# Altium PCB OpenAGBoardPart2.PcbDoc
Units mil, origin at the board's own origin, x right, y up, seen from the top; angles counter-clockwise.
Board outline 3937.01 x 3149.61 mil, 2 copper layers (Top, Bottom), stack 61.811 mil thick; 48 components, 36 nets, 240 pads, 55 vias.
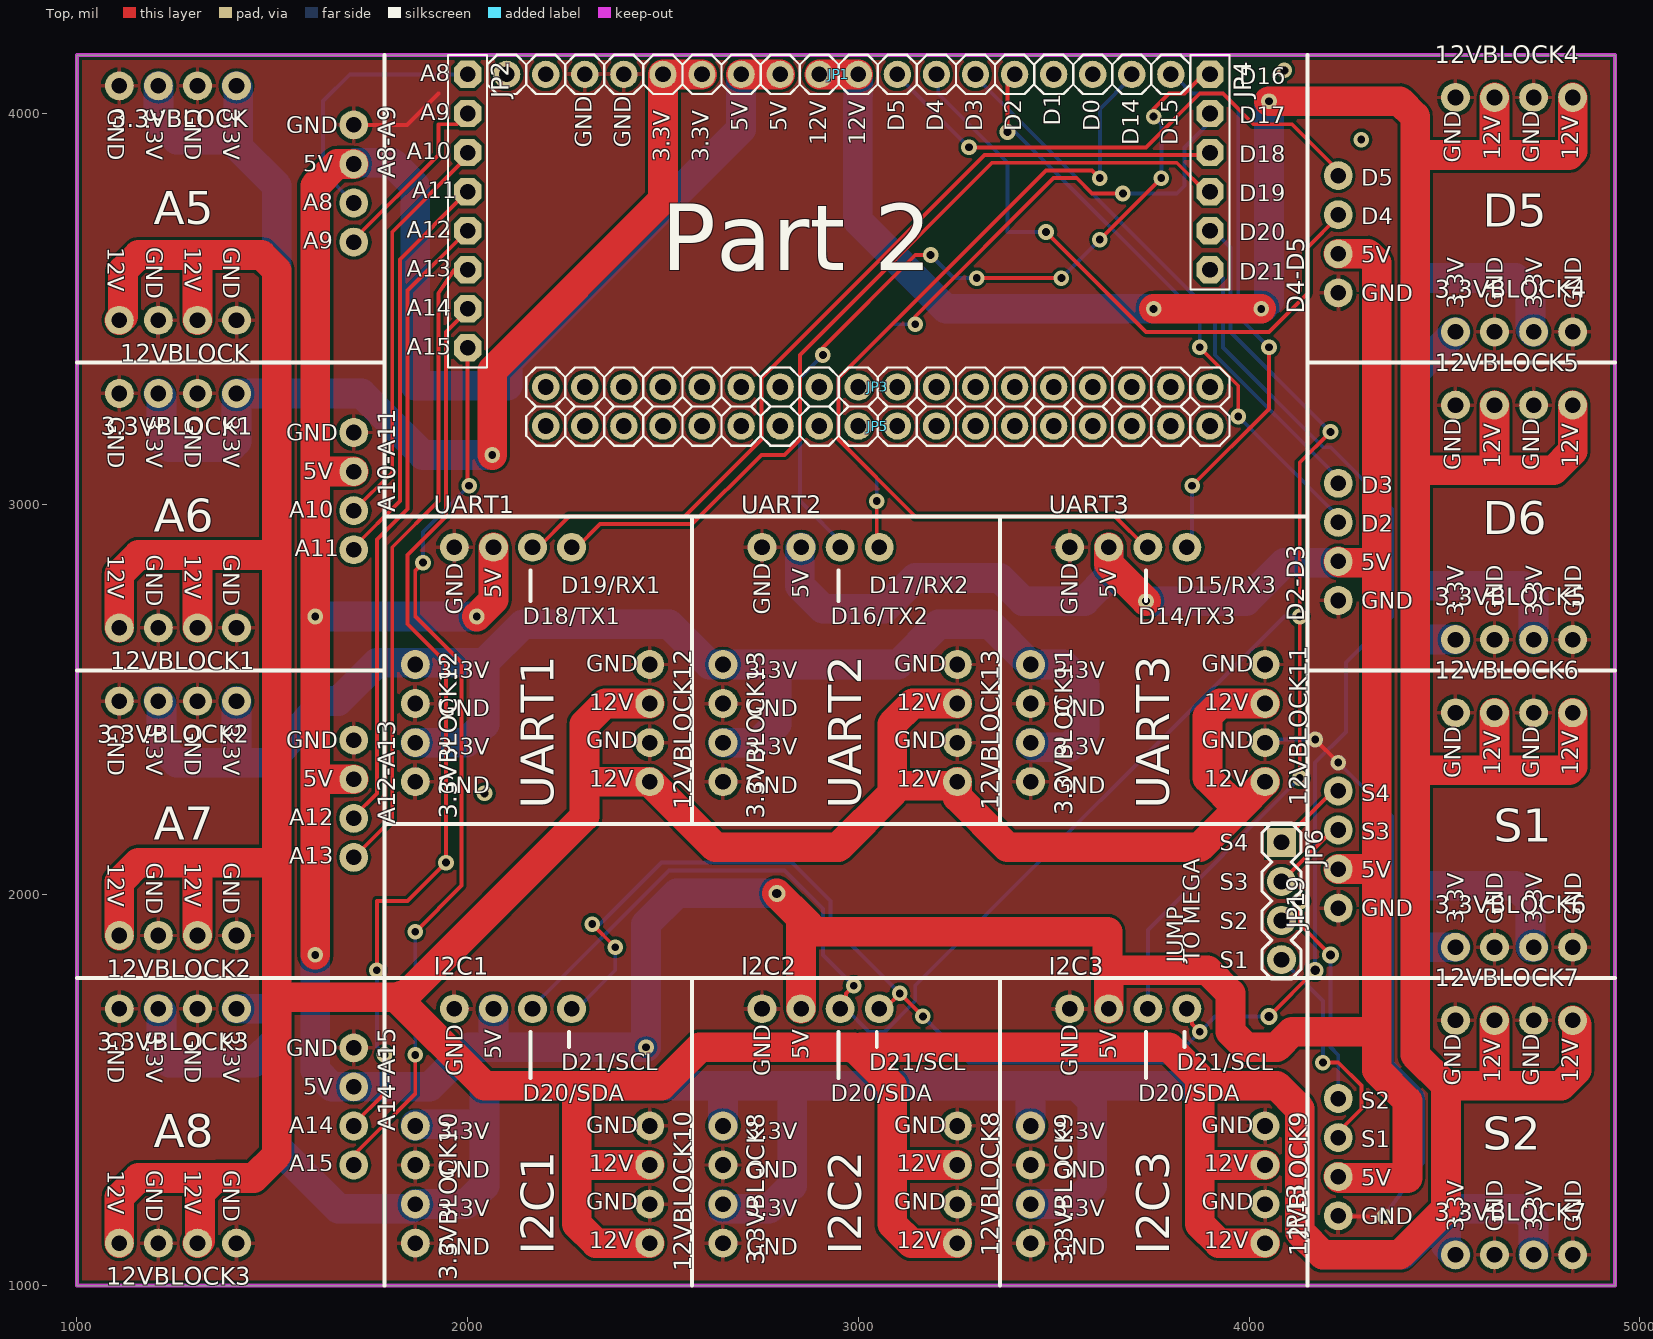
[diagram p0: Top view]
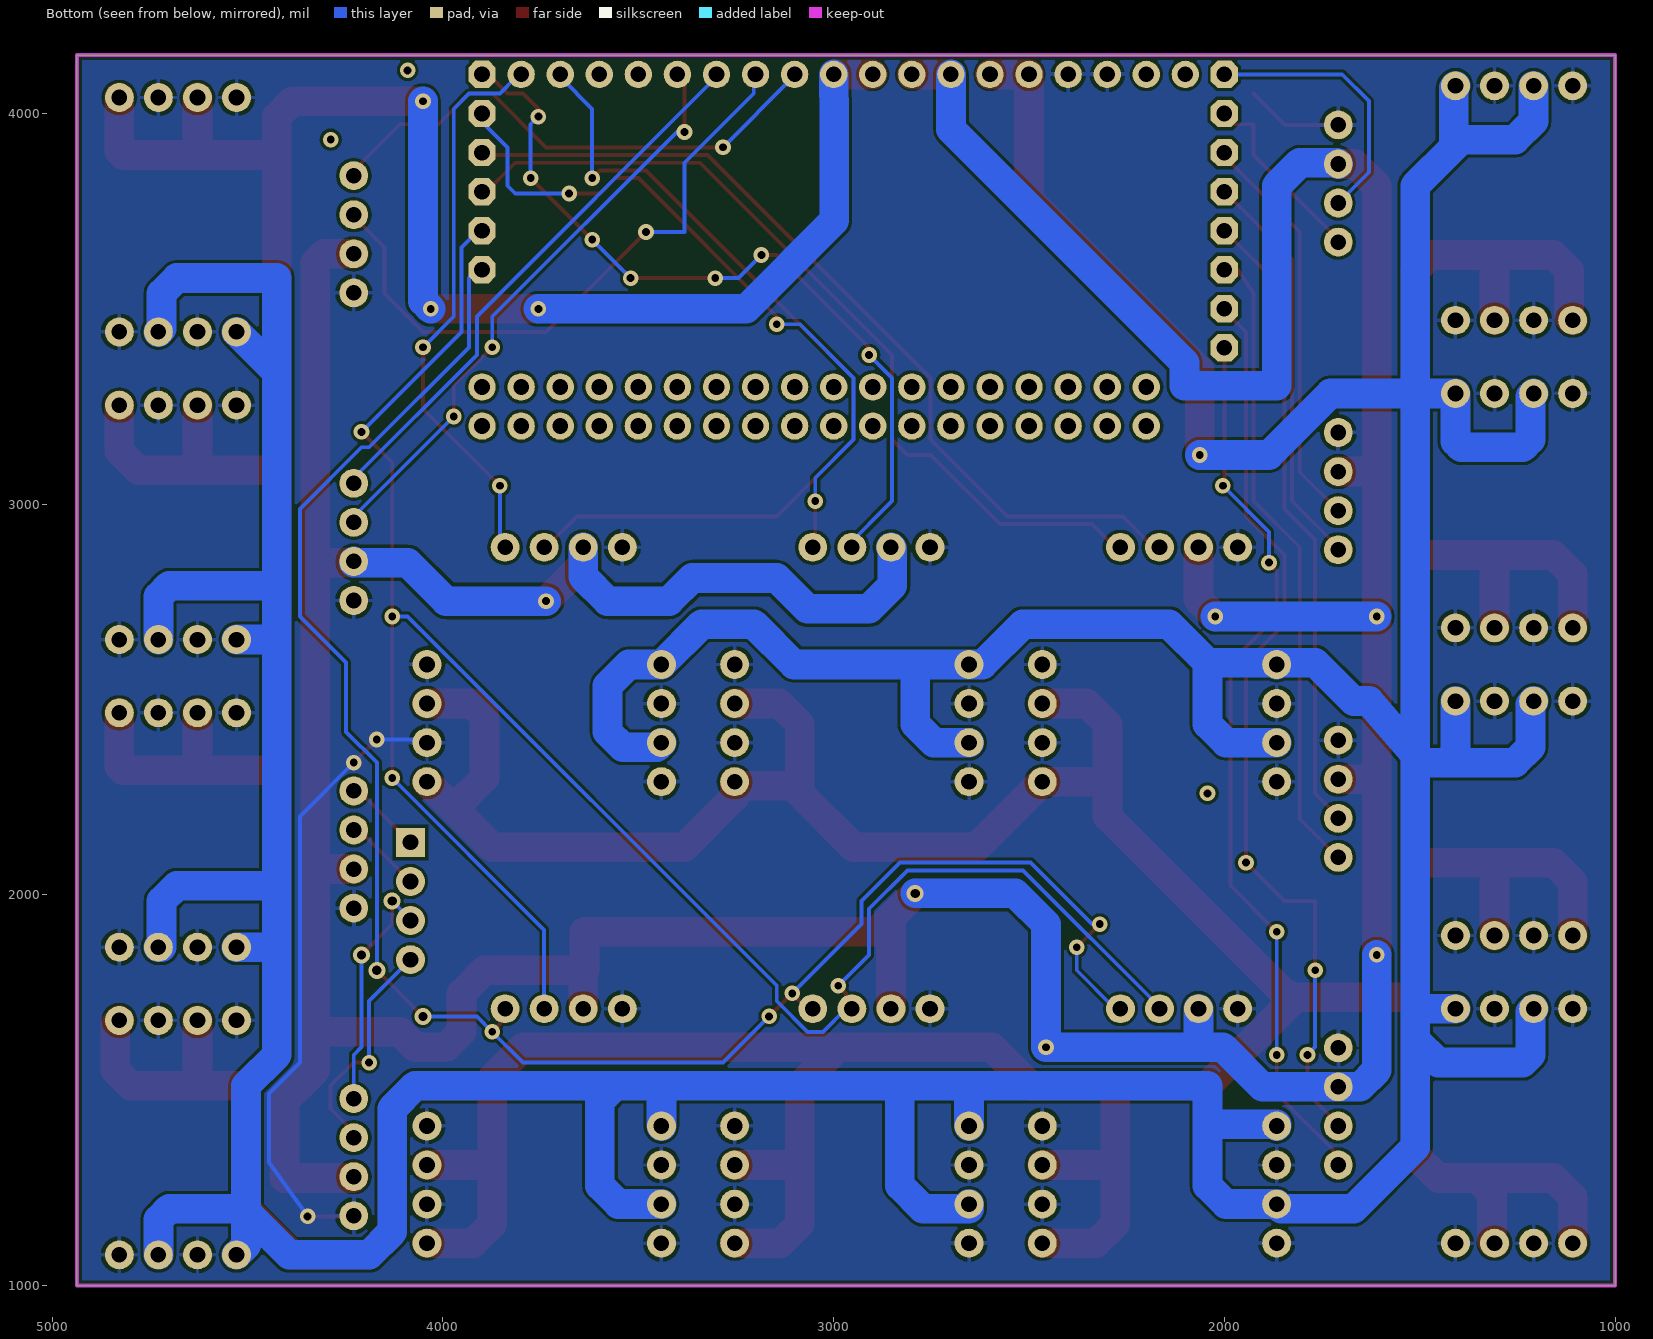
[diagram p1: Bottom view, seen from below]

## Layer stack, top to bottom
Top Solder: solder mask 0.4, Solder Resist, Dk 3.5
Top: signal copper 1.378
Dielectric 1: core 59.0551, FR-4, Dk 4.8
Bottom: signal copper 1.378
Bottom Solder: solder mask 0.4, Solder Resist, Dk 3.5

## Board outline
1000,1000 4937.01,1000 4937.01,4149.61 1000,4149.61

## Design rules (kind name [scope] priority, off if disabled: settings)
Clearance [All] p1: gap=8 except(0: SMDPad-SMDPad SMDPad-THPad SMDPad-Via)
Clearance "Clearance (Same Net)" [All] p2: gap=0 except(8: SMDPad-SMDPad SMDPad-THPad SMDPad-Via)
HoleSize HoleSize_1 [All] p1: absolutevalues=TRUE maxlimit=100000 minlimit=20 maxpercent=80.000 minpercent=20.000
HoleSize [All] p2: absolutevalues=TRUE maxlimit=100 minlimit=1 maxpercent=80.000 minpercent=20.000
HoleToHoleClearance mdViaViaSameLayer [All] p1: gap=8 allowstackedmicrovias=TRUE
HoleToHoleClearance [All] p2: gap=10 allowstackedmicrovias=TRUE
PasteMaskExpansion mlMinCreamFrame [All] p1: expansion=0
PasteMaskExpansion [All] p2: expansion=0
PolygonConnect ThermalVias [IsVia] p1: connectstyle=Direct reliefconductorwidth=10 reliefentries=4 polygonreliefangle="90 Angle" airgapwidth=10
PolygonConnect [All] p2: connectstyle=Relief reliefconductorwidth=10 reliefentries=4 polygonreliefangle="90 Angle" airgapwidth=10
RoutingVias [All] p1: holewidth=28 width=50 viastyle="Through Hole" minholewidth=28 minwidth=50 maxholewidth=28 maxwidth=50
SilkToSilkClearance [All] p1 off: silktosilkclearance=10
SilkToSolderMaskClearance [IsPad] p1 off: minsilkscreentomaskgap=10 clearancetoexposedcopper=TRUE
SolderMaskExpansion mlMinStopFrame [All] p1: expansion=4
SolderMaskExpansion [All] p2: expansion=4
Width Width_1 [All] p1: maxlimit=100000 minlimit=8 preferedwidth=10
Width [All] p2: maxlimit=10 minlimit=10 preferedwidth=10
25 further rules are at their usual default settings.

## Components (designator, comment, footprint, x,y, rotation, side; value= is the part's Value field where it differs from the comment)
3.3VBLOCK "" 1X04_NO_SILK_ALL_ROUND 1408.66,4070.87 r180 top
3.3VBLOCK1 "" 1X04_NO_SILK_ALL_ROUND 1408.66,3283.46 r180 top
3.3VBLOCK2 "" 1X04_NO_SILK_ALL_ROUND 1408.66,2496.06 r180 top
3.3VBLOCK3 "" 1X04_NO_SILK_ALL_ROUND 1408.66,1708.66 r180 top
3.3VBLOCK4 "" 1X04_NO_SILK_ALL_ROUND 4528.35,3440.94 r0 top
3.3VBLOCK5 "" 1X04_NO_SILK_ALL_ROUND 4528.35,2653.54 r0 top
3.3VBLOCK6 "" 1X04_NO_SILK_ALL_ROUND 4528.35,1866.14 r0 top
3.3VBLOCK7 "" 1X04_NO_SILK_ALL_ROUND 4528.35,1078.74 r0 top
3.3VBLOCK8 "" 1X04_NO_SILK_ALL_ROUND 2653.54,1408.66 r270 top
3.3VBLOCK9 "" 1X04_NO_SILK_ALL_ROUND 3440.94,1408.66 r270 top
3.3VBLOCK10 "" 1X04_NO_SILK_ALL_ROUND 1866.14,1408.66 r270 top
3.3VBLOCK11 "" 1X04_NO_SILK_ALL_ROUND 3440.94,2589.76 r270 top
3.3VBLOCK12 "" 1X04_NO_SILK_ALL_ROUND 1866.14,2589.76 r270 top
3.3VBLOCK13 "" 1X04_NO_SILK_ALL_ROUND 2653.54,2589.76 r270 top
12VBLOCK "" 1X04_NO_SILK_ALL_ROUND 1408.66,3470.87 r180 top
12VBLOCK1 "" 1X04_NO_SILK_ALL_ROUND 1408.66,2683.46 r180 top
12VBLOCK2 "" 1X04_NO_SILK_ALL_ROUND 1408.66,1896.06 r180 top
12VBLOCK3 "" 1X04_NO_SILK_ALL_ROUND 1408.66,1108.66 r180 top
12VBLOCK4 "" 1X04_NO_SILK_ALL_ROUND 4528.35,4040.94 r0 top
12VBLOCK5 "" 1X04_NO_SILK_ALL_ROUND 4528.35,3253.54 r0 top
12VBLOCK6 "" 1X04_NO_SILK_ALL_ROUND 4528.35,2466.14 r0 top
12VBLOCK7 "" 1X04_NO_SILK_ALL_ROUND 4528.35,1678.74 r0 top
12VBLOCK8 "" 1X04_NO_SILK_ALL_ROUND 3253.54,1408.66 r270 top
12VBLOCK9 "" 1X04_NO_SILK_ALL_ROUND 4040.94,1408.66 r270 top
12VBLOCK10 "" 1X04_NO_SILK_ALL_ROUND 2466.14,1408.66 r270 top
12VBLOCK11 "" 1X04_NO_SILK_ALL_ROUND 4040.94,2589.76 r270 top
12VBLOCK12 "" 1X04_NO_SILK_ALL_ROUND 2466.14,2589.76 r270 top
12VBLOCK13 "" 1X04_NO_SILK_ALL_ROUND 3253.54,2589.76 r270 top
A8-A9 "" 1X04_NO_SILK_ALL_ROUND 1708.66,3970.87 r270 top
A10-A11 "" 1X04_NO_SILK_ALL_ROUND 1708.66,3183.46 r270 top
A12-A13 "" 1X04_NO_SILK_ALL_ROUND 1708.66,2396.06 r270 top
A14-A15 "" 1X04_NO_SILK_ALL_ROUND 1708.66,1608.66 r270 top
D2-D3 "" 1X04_NO_SILK_ALL_ROUND 4228.35,2753.54 r90 top
D4-D5 "" 1X04_NO_SILK_ALL_ROUND 4228.35,3540.94 r90 top
I2C1 "" 1X04_NO_SILK_ALL_ROUND 1966.14,1708.66 r0 top
I2C2 "" 1X04_NO_SILK_ALL_ROUND 2753.54,1708.66 r0 top
I2C3 "" 1X04_NO_SILK_ALL_ROUND 3540.94,1708.66 r0 top
JP1 "" 1X18-BIG 2950,4100 r0 top
JP2 "" 1X08-BIG 2000,3750 r270 top
JP3 "" 1X18-BIG 3050,3300 r0 top
JP4 "" 1X06-BIG 3900,3850 r270 top
JP5 "" 1X18-BIG 3050,3200 r0 top
JP6 "" 1X04 4083.17,2134.35 r270 top
JP13 "" 1X04_NO_SILK_ALL_ROUND 4228.35,1178.74 r90 top
JP19 "" 1X04_NO_SILK_ALL_ROUND 4228.35,1966.14 r90 top
UART1 "" 1X04_NO_SILK_ALL_ROUND 1966.14,2889.76 r0 top
UART2 "" 1X04_NO_SILK_ALL_ROUND 2753.54,2889.76 r0 top
UART3 "" 1X04_NO_SILK_ALL_ROUND 3540.94,2889.76 r0 top

## Footprints (in the part's own frame and the unit in brackets; to place one, negate y for a bottom-side part, rotate by r counter-clockwise, add the part's x,y. Pads: shape width x height; smd on the part's side, far side on the other; paste and mask are expansions set on the pad)
1X04 [mil] "1X04"
  rect 74x74 hole 40: 1(0,0)
  round 74 hole 40: 2(100,0) 3(200,0) 4(300,0)
  silkscreen extent -50,-50 350,50
1X04_NO_SILK_ALL_ROUND [mil] "1X04_NO_SILK_ALL_ROUND"
  round 74 hole 40: 1(0,0) 2(100,0) 3(200,0) 4(300,0)
1X06-BIG [mil] "1X06-BIG"
  oct 70x70 hole 40: 1(-250,0) 2(-150,0) 3(-50,0) 4(50,0) 5(150,0) 6(250,0)
  silkscreen extent -300,-50 300,50
1X08-BIG [mil] "1X08-BIG"
  oct 70x70 hole 40: 1(-350,0) 2(-250,0) 3(-150,0) 4(-50,0) 5(50,0) 6(150,0) 7(250,0) 8(350,0)
  silkscreen extent -400,-50 400,50
1X18-BIG [mil] "1X18-BIG"
  round 70 hole 40: 1(-850,0) 2(-750,0) 3(-650,0) 4(-550,0) 5(-450,0) 6(-350,0) 7(-250,0) 8(-150,0) 9(-50,0) 10(50,0) 11(150,0) 12(250,0) 13(350,0) 14(450,0) 15(550,0) 16(650,0) 17(750,0) 18(850,0)
  silkscreen extent -900,-50 900,50

## Part data
3.3VBLOCK 3.3VBLOCK1 3.3VBLOCK2 3.3VBLOCK3 3.3VBLOCK4 3.3VBLOCK5 3.3VBLOCK6 3.3VBLOCK7 3.3VBLOCK8 3.3VBLOCK9 3.3VBLOCK10 3.3VBLOCK11 3.3VBLOCK12 3.3VBLOCK13 12VBLOCK 12VBLOCK1 12VBLOCK2 12VBLOCK3 12VBLOCK4 12VBLOCK5 12VBLOCK6 12VBLOCK7 12VBLOCK8 12VBLOCK9 12VBLOCK10 12VBLOCK11 12VBLOCK12 12VBLOCK13 A8-A9 A10-A11 A12-A13 A14-A15 D2-D3 D4-D5 I2C1 I2C2 I2C3 JP13 JP19 UART1 UART2 UART3: library part 1X04_NO_SILK_ALL_ROUND
JP1 JP3 JP5: library part 1X18-BIG
JP2: library part 1X08-BIG
JP4: library part 1X06-BIG
JP6: library part 1X04

## Via types
v1: diameter 40/40 (per signal layer), hole 20, Top to Bottom, 50 vias
v2: diameter 43.62/43.62 (per signal layer), hole 23.62, Top to Bottom, 5 vias

## Nets (pads, with @x,y where several pads share a name; then routed paths per layer and width w, separated by ;. In a path a pad name is that pad's centre, name@x,y a point inside that pad or via, vN(x,y) a via of type N, cw(c..) or ccw(c..) an arc to the next point about the centre after c; other vN are vias at no path point)
3.3V: 3.3VBLOCK1.1 3.3VBLOCK1.3 3.3VBLOCK2.1 3.3VBLOCK2.3 3.3VBLOCK3.1 3.3VBLOCK3.3 3.3VBLOCK4.1 3.3VBLOCK4.3 3.3VBLOCK5.1 3.3VBLOCK5.3 3.3VBLOCK6.1 3.3VBLOCK6.3 3.3VBLOCK7.1 3.3VBLOCK7.3 3.3VBLOCK8.1 3.3VBLOCK8.3 3.3VBLOCK9.1 3.3VBLOCK9.3 3.3VBLOCK10.1 3.3VBLOCK10.3 3.3VBLOCK11.1 3.3VBLOCK11.3 3.3VBLOCK12.1 3.3VBLOCK12.3 3.3VBLOCK13.1 3.3VBLOCK13.3 3.3VBLOCK.1 3.3VBLOCK.3 JP1.5 JP1.6 | length 19544.1
  Top w76: v1(2062.99,3125.98) 2062.99,3342.52 2500,3779.53 JP1.5 JP1.6
  Bottom w76: 3.3VBLOCK3.3 1216.54,1700.79 1216.54,1590.55 1236.22,1570.87 1452.76,1570.87 1511.81,1629.92 ; 3.3VBLOCK2.3 1216.54,2488.19 1216.54,2377.95 1255.91,2338.58 1433.07,2338.58 ; 3.3VBLOCK1.3 1216.54,3275.59 1216.54,3165.35 1236.22,3145.67 1393.7,3145.67 1408.66,3160.63 3.3VBLOCK1.1 1511.81,3283.46 ; 3.3VBLOCK.3 1208.66,3980.32 1255.91,3933.07 1393.7,3933.07 1413.39,3913.39 ; 3.3VBLOCK3.1 1511.81,1708.66 ; 3.3VBLOCK2.1 1408.66,2362.99 1433.07,2338.58 ; 3.3VBLOCK.1 1413.39,4066.14 1413.39,3913.39 ; 3.3VBLOCK10.1 1866.14,1413.39 2043.31,1413.39 ; 3.3VBLOCK12.3 1996.06,2389.76 2043.31,2437.01 2043.31,2594.49 ; v1(2062.99,3125.98) 1885.83,3125.98 1728.35,3283.46 1531.5,3283.46 ; 3.3VBLOCK8.3 2653.54,1196.85 2771.65,1196.85 2830.71,1255.91 2830.71,1492.13 2811.02,1511.81 ; 3.3VBLOCK8.1 2653.54,1511.81 ; 3.3VBLOCK13.3 2744.09,2389.76 2791.34,2437.01 2791.34,2570.08 2811.02,2589.76 ; 3.3VBLOCK9.3 3551.18,1208.66 3598.43,1255.91 3598.43,1472.44 3559.06,1511.81 ; 3.3VBLOCK9.1 3440.94,1511.81 ; 3.3VBLOCK11.3 3452.76,2377.95 3539.37,2377.95 3578.74,2417.32 3578.74,2535.43 3524.41,2589.76 3.3VBLOCK11.1 3337.8,2692.91 3204.72,2692.91 3101.57,2589.76 2811.02,2589.76 ; 3.3VBLOCK7.1 4503.94,1103.15 4503.94,1189.47 ; 3.3VBLOCK6.1 4425.2,1866.14 ; 3.3VBLOCK5.1 4425.2,2653.54 ; 3.3VBLOCK4.1 4425.2,3337.8 ; 3.3VBLOCK7.3 4728.35,1169.29 4700.79,1196.85 4503.94,1196.85 ; 3.3VBLOCK6.3 4720.47,1866.14 4720.47,1984.25 4681.1,2023.62 4425.2,2023.62 ; 3.3VBLOCK5.3 4728.35,2763.78 4700.79,2791.34 4425.2,2791.34 ; 3.3VBLOCK4.3 4720.47,3448.82 4720.47,3539.37 4681.1,3578.74 4425.2,3578.74 4425.2,3337.8 ; 1413.39,3913.39 1511.81,3814.96 1511.81,3283.46 ; 1433.07,2338.58 1511.81,2338.58 ; 1511.81,1629.92 1511.81,1708.66 ; 1511.81,1629.92 1511.81,1354.33 1669.29,1196.85 1854.33,1196.85 3.3VBLOCK10.3 1996.06,1208.66 2043.31,1255.91 2043.31,1413.39 ; 1511.81,1708.66 1511.81,2338.58 ; 1511.81,2338.58 1511.81,2358.27 ; 1511.81,2358.27 1511.81,3263.78 1531.5,3283.46 ; 1511.81,2358.27 1629.92,2496.06 1669.29,2496.06 1767.72,2594.49 1861.42,2594.49 3.3VBLOCK12.1 1870.87,2594.49 2043.31,2594.49 ; 1511.81,3283.46 1531.5,3283.46 ; 2043.31,1413.39 2043.31,1511.81 2653.54,1511.81 ; 2043.31,2594.49 2141.73,2692.91 2515.75,2692.91 2618.9,2589.76 3.3VBLOCK13.1 2811.02,2589.76 ; 2653.54,1511.81 2811.02,1511.81 ; 2811.02,1511.81 3440.94,1511.81 ; 3440.94,1511.81 3559.06,1511.81 ; 3559.06,1511.81 4070.87,1511.81 4129.92,1452.76 4129.92,1137.8 4188.98,1078.74 4393.21,1078.74 4503.94,1189.47 ; 4425.2,1866.14 4425.2,1590.55 4503.94,1511.81 4503.94,1196.85 ; 4425.2,1866.14 4425.2,2023.62 ; 4425.2,2023.62 4425.2,2653.54 ; 4425.2,2653.54 4425.2,2791.34 ; 4425.2,2791.34 4425.2,3337.8 ; 4503.94,1189.47 4503.94,1196.85
5V: A8-A9.2 A10-A11.2 A12-A13.2 A14-A15.2 D2-D3.2 D4-D5.2 I2C1.2 I2C2.2 I2C3.2 JP1.7 JP1.8 JP13.2 JP19.2 UART1.2 UART2.2 UART3.2 | length 13775.5
  Top w76: v1(1610.24,1846.46) 1610.24,2299.21 ; A12-A13.2 1613.39,2296.06 1610.24,2299.21 ; A10-A11.2 1613.39,3083.46 1610.24,3086.61 ; A8-A9.2 1666.14,3870.87 1610.24,3814.96 1610.24,3086.61 ; v1(2023.62,2712.6) 2066.14,2755.12 UART1.2 ; JP1.7 JP1.8 ; v2(2791.34,2003.94) 2860.24,1935.04 ; I2C2.2 2853.54,1928.35 2860.24,1935.04 ; I2C3.2 3640.94,1790.55 3657.48,1807.09 ; UART3.2 3640.94,2847.24 v1(3736.22,2751.97) ; JP13.2 4231.5,1275.59 4405.51,1275.59 4405.51,1472.44 4326.77,1551.18 4326.77,1649.61 ; JP19.2 4310.24,2066.14 4326.77,2082.68 ; D2-D3.2 4231.5,2850.39 4326.77,2850.39 ; D4-D5.2 4303.94,3640.94 4326.77,3618.11 4326.77,2850.39 ; 1610.24,2299.21 v1(1610.24,2712.6) 1610.24,3086.61 ; 2860.24,1935.04 2889.76,1905.51 3637.8,1905.51 3637.8,1807.09 3657.48,1807.09 ; 3657.48,1807.09 3893.7,1807.09 3952.76,1748.03 3952.76,1649.61 3992.13,1610.24 4070.87,1610.24 4110.24,1649.61 4326.77,1649.61 ; 4326.77,1649.61 4326.77,2082.68 ; 4326.77,2082.68 4326.77,2850.39
  Bottom w76: v1(1610.24,1846.46) 1610.24,1551.18 1652.76,1508.66 A14-A15.2 1902.36,1508.66 2003.94,1610.24 2062.99,1610.24 ; v1(1610.24,2712.6) v1(2023.62,2712.6) ; A8-A9.2 1711.81,3874.02 1807.09,3874.02 1866.14,3814.96 1866.14,3303.15 2102.36,3303.15 2102.36,3362.2 2700,3959.84 JP1.7 ; I2C1.2 2066.14,1613.39 2062.99,1610.24 ; v2(2791.34,2003.94) 2535.43,2003.94 2456.69,1925.2 v1(2456.69,1610.24) 2062.99,1610.24 ; UART2.2 2850.39,2886.61 2850.39,2791.34 2909.45,2732.28 3066.93,2732.28 3145.67,2811.02 3362.2,2811.02 3421.26,2751.97 3578.74,2751.97 3640.94,2814.17 UART3.2 ; v1(3736.22,2751.97) 3992.13,2751.97 4090.55,2850.39 D2-D3.2@4225.2,2850.39 ; D2-D3.2@4228.35,2850.39 D2-D3.2@4225.2,2850.39 ; D2-D3.2 D2-D3.2@4225.2,2850.39
12V: 12VBLOCK1.2 12VBLOCK1.4 12VBLOCK2.2 12VBLOCK2.4 12VBLOCK3.2 12VBLOCK3.4 12VBLOCK4.2 12VBLOCK4.4 12VBLOCK5.2 12VBLOCK5.4 12VBLOCK6.2 12VBLOCK6.4 12VBLOCK7.2 12VBLOCK7.4 12VBLOCK8.2 12VBLOCK8.4 12VBLOCK9.2 12VBLOCK9.4 12VBLOCK10.2 12VBLOCK10.4 12VBLOCK11.2 12VBLOCK11.4 12VBLOCK12.2 12VBLOCK12.4 12VBLOCK13.2 12VBLOCK13.4 12VBLOCK.2 12VBLOCK.4 JP1.9 JP1.10 | length 23206
  Top w76: 12VBLOCK3.4 1108.66,1226.77 1157.48,1275.59 1354.33,1275.59 ; 12VBLOCK2.4 1108.66,2033.86 1157.48,2082.68 1314.96,2082.68 ; 12VBLOCK1.4 1108.66,2821.26 1157.48,2870.08 1314.96,2870.08 ; 12VBLOCK.4 1118.11,3480.32 1118.11,3598.43 1157.48,3637.8 1314.96,3637.8 ; 12VBLOCK3.2 1314.96,1114.96 1314.96,1236.22 1354.33,1275.59 ; 12VBLOCK2.2 1308.66,2076.38 1314.96,2082.68 ; 12VBLOCK1.2 1308.66,2863.78 1314.96,2870.08 ; 12VBLOCK.2 1308.66,3631.5 1314.96,3637.8 ; 12VBLOCK10.4 2328.35,1108.66 2279.53,1157.48 2279.53,1314.96 ; 12VBLOCK10.2 2285.83,1308.66 2279.53,1314.96 ; 12VBLOCK12.2 2351.97,2489.76 2299.21,2437.01 2299.21,2289.76 ; JP1.9 JP1.10 ; 12VBLOCK8.4 3135.43,1108.66 3086.61,1157.48 3086.61,1314.96 ; 12VBLOCK8.2 3092.91,1308.66 3086.61,1314.96 ; 12VBLOCK13.2 3139.37,2489.76 3086.61,2437.01 3086.61,2279.53 ; v1(3755.91,3500) v1(4031.5,3500) ; 12VBLOCK9.4 3922.83,1108.66 3874.02,1157.48 3874.02,1314.96 ; 12VBLOCK9.2 3880.32,1308.66 3874.02,1314.96 ; 12VBLOCK11.4 4040.94,2288.98 3972.44,2220.47 ; 12VBLOCK11.2 3926.77,2489.76 3893.7,2456.69 3893.7,2299.21 3972.44,2220.47 ; v1(4051.18,4031.5) 4385.83,4031.5 4425.2,3992.13 4425.2,3874.02 ; 12VBLOCK7.2 4628.35,1525.2 4641.73,1511.81 ; 12VBLOCK6.2 4628.35,2325.2 4622.05,2318.9 ; 12VBLOCK5.2 4628.35,3100 4641.73,3086.61 ; 12VBLOCK4.2 4628.35,3900 4622.05,3893.7 ; 12VBLOCK7.4 4838.58,1668.5 4838.58,1551.18 4799.21,1511.81 4641.73,1511.81 ; 12VBLOCK6.4 4828.35,2328.35 4818.9,2318.9 4622.05,2318.9 ; 12VBLOCK5.4 4828.35,3135.43 4779.53,3086.61 4641.73,3086.61 ; 12VBLOCK4.4 4828.35,3903.15 4818.9,3893.7 4622.05,3893.7 ; 1314.96,2082.68 1492.13,2082.68 1511.81,2062.99 ; 1314.96,2870.08 1511.81,2870.08 ; 1314.96,3637.8 1472.44,3637.8 1511.81,3598.43 1511.81,2870.08 ; 1354.33,1275.59 1452.76,1275.59 1511.81,1334.65 1511.81,1748.03 ; 1511.81,1748.03 1511.81,2062.99 ; 1511.81,1748.03 1521.65,1738.19 1816.93,1738.19 ; 1511.81,2062.99 1511.81,2870.08 ; 1816.93,1738.19 2043.31,1511.81 2279.53,1511.81 ; 1816.93,1738.19 1846.46,1748.03 2299.21,2200.79 2299.21,2289.76 ; 2279.53,1314.96 2279.53,1511.81 ; 2279.53,1511.81 2496.06,1511.81 2594.49,1610.24 2988.19,1610.24 2998.03,1600.39 ; 2299.21,2289.76 12VBLOCK12.4 2633.86,2122.05 2948.82,2122.05 3086.61,2259.84 3086.61,2279.53 ; 2998.03,1600.39 3086.61,1511.81 3086.61,1314.96 ; 2998.03,1600.39 3007.87,1610.24 3795.28,1610.24 3874.02,1531.5 3874.02,1511.81 ; 3086.61,2279.53 3243.31,2279.53 12VBLOCK13.4 3253.54,2250.39 3381.89,2122.05 3874.02,2122.05 3972.44,2220.47 ; 3874.02,1314.96 3874.02,1511.81 ; 3874.02,1511.81 4070.87,1511.81 4129.92,1452.76 4129.92,1137.8 4188.98,1078.74 4385.83,1078.74 4503.94,1196.85 4503.94,1511.81 ; 4425.2,2318.9 4425.2,3086.61 ; 4425.2,2318.9 4425.2,1590.55 4503.94,1511.81 ; 4425.2,2318.9 4622.05,2318.9 ; 4425.2,3086.61 4425.2,3874.02 ; 4425.2,3086.61 4641.73,3086.61 ; 4425.2,3874.02 4444.88,3893.7 4622.05,3893.7 ; 4503.94,1511.81 4641.73,1511.81
  Bottom w76: JP1.10 2998.43,3981.89 2998.43,3725.98 3224.41,3500 v1(3755.91,3500) ; v1(4031.5,3500) 4051.18,3519.69 v1(4051.18,4031.5)
A8: A8-A9.3 JP2.1 | length 691.7
  Bottom w10: A8-A9.3 1629.92,3849.61 1629.92,4031.5 1698.43,4100 JP2.1
A9: A8-A9.4 JP2.2 | length 477.5
  Top w10: A8-A9.4 1708.66,3677.17 1925.2,3893.7 1925.2,3972.44 1972.44,3972.44 JP2.2
A10: A10-A11.3 JP2.3 | length 1037.2
  Top w10: A10-A11.3 1807.09,3081.89 1807.09,3696.85 2000,3889.76 JP2.3
A11: A10-A11.4 JP2.4 | length 1037.2
  Top w10: A10-A11.4 1708.66,2889.76 1826.77,3007.87 1826.77,3626.77 JP2.4
A12: A12-A13.3 JP2.5 | length 1624.6
  Top w10: A12-A13.3 1708.66,2200.79 1767.72,2259.84 1767.72,2909.45 1846.46,2988.19 1846.46,3546.46 JP2.5
A13: A12-A13.4 JP2.6 | length 1640
  Top w10: A12-A13.4 1807.09,2194.49 1807.09,2889.76 1925.2,3007.87 1925.2,3539.37 1966.14,3600 JP2.6
A14: A14-A15.3 JP2.7 | length 2356
  Top w10: A14-A15.3 1708.66,1413.39 1787.4,1492.13 v1(1787.4,1590.55) ; v1(1767.72,1807.09) 1767.72,1984.25 1846.46,1984.25 v1(1944.88,2082.68) 1944.88,2594.49 1846.46,2692.91 1846.46,2870.08 1944.88,2968.5 1944.88,3440.94 2000,3496.06 JP2.7
  Bottom w10: v1(1767.72,1807.09) 1767.72,1610.24 v1(1787.4,1590.55)
A15: A14-A15.4 JP2.8 | length 2313.1
  Top w10: A14-A15.4 1708.66,1334.65 1866.14,1492.13 v1(1866.14,1590.55) ; v1(1866.14,1905.51) 1984.25,2023.62 1984.25,2594.49 1866.14,2712.6 1866.14,2830.71 v1(1885.83,2850.39) ; JP2.8 2000,3051.18 v1(2003.94,3047.24)
  Bottom w10: v1(1866.14,1590.55) v1(1866.14,1905.51) ; v1(1885.83,2850.39) 1885.83,2929.13 v1(2003.94,3047.24)
D0: JP1.16
D1: JP1.15
D2: D2-D3.3 JP1.14 | length 1519.6
  Top w10: v1(3381.89,3952.76) 3381.89,4090.55 JP1.14 ; v1(3874.02,3401.57) 3972.44,3303.15 v1(3972.44,3224.41)
  Bottom w10: v1(3381.89,3952.76) 3401.57,3952.76 3874.02,3480.32 v1(3874.02,3401.57) ; v1(3972.44,3224.41) 4228.35,2968.5 D2-D3.3
D3: D2-D3.4 JP1.13 | length 1430.2
  Bottom w10: JP1.13 3303.15,4090.55 3913.39,3480.32 3913.39,3381.89 4228.35,3066.93 D2-D3.4
D4: D4-D5.3 JP1.12 | length 1626.3
  Top w10: v1(3480.32,3696.85) 3736.22,3440.94 4051.18,3440.94 4149.61,3539.37 4149.61,3657.48 4228.35,3736.22 D4-D5.3
  Bottom w10: JP1.12 3204.72,4090.55 3204.72,4051.18 3381.89,3874.02 3381.89,3696.85 v1(3480.32,3696.85)
D5: D4-D5.4 JP1.11 | length 1358.8
  Top w10: v1(3283.46,3913.39) 3736.22,3913.39 3874.02,4051.18 3933.07,4051.18 4011.81,3972.44 4110.24,3972.44 4228.35,3854.33 D4-D5.4
  Bottom w10: JP1.11 3106.3,4090.55 v1(3283.46,3913.39)
D14: JP1.17 UART3.3 | length 2259.8
  Top w10: v1(3618.11,3834.65) 3598.43,3854.33 3480.32,3854.33 2948.82,3322.83 2948.82,3165.35 3145.67,2968.5 3657.48,2968.5 3736.22,2889.76 UART3.3
  Bottom w10: v1(3618.11,3834.65) 3618.11,4011.81 3696.85,4090.55 JP1.17
D15: JP1.18 UART3.4 | length 1457.4
  Top w10: v1(3854.33,3047.24) 4051.18,3244.09 v1(4051.18,3401.57)
  Bottom w10: JP1.18 3814.96,4090.55 3854.33,4051.18 3933.07,4051.18 3972.44,4011.81 3972.44,3480.32 v1(4051.18,3401.57) ; UART3.4 3854.33,2889.76 v1(3854.33,3047.24)
D16: JP4.1 UART2.3 | length 2060.6
  Top w10: v1(2909.45,3381.89) 2909.45,3401.57 3145.67,3637.8 v1(3185.04,3637.8) ; v1(3303.15,3578.74) v1(3519.69,3578.74) ; v1(3618.11,3677.17) v1(3775.59,3834.65) ; v1(3755.91,3992.13) 3755.91,4011.81 3795.28,4051.18 3834.65,4051.18 3883.46,4100 JP4.1
  Bottom w10: v1(2909.45,3381.89) 2850.39,3322.83 2850.39,3007.87 2968.5,2889.76 UART2.3 ; v1(3185.04,3637.8) 3244.09,3578.74 v1(3303.15,3578.74) ; v1(3519.69,3578.74) v1(3618.11,3677.17) ; v1(3755.91,3992.13) 3775.59,3972.44 v1(3775.59,3834.65)
D17: JP4.2 UART2.4 | length 1826.1
  Top w10: v1(3047.24,3007.87) 3047.24,2889.76 UART2.4 ; v1(3145.67,3460.63) 3145.67,3480.32 3500,3834.65 3559.06,3834.65 3598.43,3795.28 v1(3677.17,3795.28)
  Bottom w10: v1(3047.24,3007.87) 3047.24,3066.93 2948.82,3165.35 2948.82,3322.83 3086.61,3460.63 v1(3145.67,3460.63) ; v1(3677.17,3795.28) 3814.96,3795.28 3834.65,3814.96 3834.65,3913.39 3900,3978.74 JP4.2
D18: JP4.3 UART1.3 | length 2244.6
  Top w10: UART1.3 2181.1,2889.76 2259.84,2968.5 2555.12,2968.5 2751.97,3165.35 2751.97,3322.83 3322.83,3893.7 3893.7,3893.7 JP4.3
D19: JP4.4 UART1.4 | length 2202.6
  Top w10: UART1.4 2279.53,2889.76 2338.58,2948.82 2574.8,2948.82 2751.97,3125.98 2811.02,3125.98 2850.39,3165.35 2850.39,3381.89 3342.52,3874.02 3814.96,3874.02 3893.7,3795.28 JP4.4
D20: I2C1.3 I2C2.3 I2C3.3 JP4.5 | length 5234.1
  Top w10: I2C2.3 2968.5,1708.66 2968.5,1748.03 v1(2988.19,1767.72) ; v1(4129.92,2299.21) v1(4129.92,2712.6) 4129.92,3106.3 v1(4208.66,3185.04)
  Bottom w10: I2C1.3 2161.42,1708.66 2515.75,2062.99 2811.02,2062.99 2909.45,1964.57 2909.45,1846.46 v1(2988.19,1767.72) ; I2C2.3 2968.5,1708.66 3027.56,1649.61 3066.93,1649.61 3145.67,1728.35 3145.67,1767.72 4090.55,2712.6 v1(4129.92,2712.6) ; I2C3.3 3740.94,1910.24 v1(4129.92,2299.21) ; JP4.5 3913.39,3696.85 3952.76,3657.48 3952.76,3440.94 v1(4208.66,3185.04)
D21: I2C1.4 I2C2.4 I2C3.4 JP4.6 | length 4790.3
  Top w10: v1(2318.9,1925.2) v1(2377.95,1866.14) ; I2C2.4 3066.93,1708.66 v1(3106.3,1748.03) v1(3165.35,1688.98) ; I2C3.4 3854.33,1708.66 3854.33,1669.29 v1(3874.02,1649.61) ; v2(4051.18,1688.98) v2(4169.29,1807.09)
  Bottom w10: I2C1.4 2279.53,1708.66 2377.95,1807.09 v1(2377.95,1866.14) ; v1(2318.9,1925.2) 2338.58,1925.2 2496.06,2082.68 2830.71,2082.68 2929.13,1984.25 2929.13,1925.2 v1(3106.3,1748.03) ; v1(3165.35,1688.98) 3283.46,1570.87 3795.28,1570.87 v1(3874.02,1649.61) 3913.39,1688.98 v2(4051.18,1688.98) ; JP4.6 3913.39,3598.43 3933.07,3578.74 3933.07,3401.57 4188.98,3145.67 4208.66,3145.67 4366.14,2988.19 4366.14,2712.6 4248.03,2594.49 4248.03,2417.32 4169.29,2338.58 v2(4169.29,1807.09)
GND: 3.3VBLOCK1.2 3.3VBLOCK1.4 3.3VBLOCK2.2 3.3VBLOCK2.4 3.3VBLOCK3.2 3.3VBLOCK3.4 3.3VBLOCK4.2 3.3VBLOCK4.4 3.3VBLOCK5.2 3.3VBLOCK5.4 3.3VBLOCK6.2 3.3VBLOCK6.4 3.3VBLOCK7.2 3.3VBLOCK7.4 3.3VBLOCK8.2 3.3VBLOCK8.4 3.3VBLOCK9.2 3.3VBLOCK9.4 3.3VBLOCK10.2 3.3VBLOCK10.4 3.3VBLOCK11.2 3.3VBLOCK11.4 3.3VBLOCK12.2 3.3VBLOCK12.4 3.3VBLOCK13.2 3.3VBLOCK13.4 3.3VBLOCK.2 3.3VBLOCK.4 12VBLOCK1.1 12VBLOCK1.3 12VBLOCK2.1 12VBLOCK2.3 12VBLOCK3.1 12VBLOCK3.3 12VBLOCK4.1 12VBLOCK4.3 12VBLOCK5.1 12VBLOCK5.3 12VBLOCK6.1 12VBLOCK6.3 12VBLOCK7.1 12VBLOCK7.3 12VBLOCK8.1 12VBLOCK8.3 12VBLOCK9.1 12VBLOCK9.3 12VBLOCK10.1 12VBLOCK10.3 12VBLOCK11.1 12VBLOCK11.3 12VBLOCK12.1 12VBLOCK12.3 12VBLOCK13.1 12VBLOCK13.3 12VBLOCK.1 12VBLOCK.3 A8-A9.1 A10-A11.1 A12-A13.1 A14-A15.1 D2-D3.1 D4-D5.1 I2C1.1 I2C2.1 I2C3.1 JP1.3 JP1.4 JP13.1 JP19.1 UART1.1 UART2.1 UART3.1 | length 1871.5
  Top w10: A8-A9.1 1844.88,3970.87 1925.2,4051.18 ; 3.3VBLOCK8.2 3.3VBLOCK8.2@2659.84,1308.66 ; v1(4169.29,2397.64) v1(4228.35,2338.58) ; JP13.1 4248.03,1177.17 v1(4346.46,1177.17)
  Bottom w10: 12VBLOCK11.3 4051.18,2397.64 v1(4169.29,2397.64) ; v1(4228.35,2338.58) 4366.14,2200.79 4366.14,1570.87 4444.88,1492.13 4444.88,1314.96 v1(4346.46,1177.17)
N$1: JP1.1
N$2: JP1.2
N$3: 
N$6: 
  other v1: 2043.31,2259.84
N$8: 
  other v1: 4090.55,4110.24
N$9: 
  other v1: 4287.4,3933.07
N$10: JP6.1 JP19.4 | length 199.8
  Top w10: JP6.1 4214.96,2266.14 JP19.4
N$12: JP6.2 JP19.3 | length 199.8
  Top w10: JP6.2 4214.96,2166.14 JP19.3
N$15: JP6.3 JP13.4 | length 614.8
  Top w10: v2(4129.92,1984.25) 4129.92,1925.2 v2(4208.66,1846.46)
  Bottom w10: JP6.3 4090.55,1944.88 v2(4129.92,1984.25) ; v2(4208.66,1846.46) 4208.66,1610.24 4228.35,1590.55 JP13.4
N$16: JP6.4 JP13.3 | length 587.7
  Top w10: v1(4188.98,1570.87) 4228.35,1570.87 4287.4,1511.81 4287.4,1452.76 4228.35,1393.7 JP13.3
  Bottom w10: JP6.4 4090.55,1826.77 4188.98,1728.35 v1(4188.98,1570.87)
pads on no net: JP3.1 JP3.2 JP3.3 JP3.4 JP3.5 JP3.6 JP3.7 JP3.8 JP3.9 JP3.10 JP3.11 JP3.12 JP3.13 JP3.14 JP3.15 JP3.16 JP3.17 JP3.18 JP5.1 JP5.2 JP5.3 JP5.4 JP5.5 JP5.6 JP5.7 JP5.8 JP5.9 JP5.10 JP5.11 JP5.12 JP5.13 JP5.14 JP5.15 JP5.16 JP5.17 JP5.18

## Polygon pours and split planes (outlines as drawn)
GND on Bottom "Bottom-GND" (hatched 90Degree grid 0.1 track 0.1, remove dead copper, pour order 0): 995,995 4942.01,995 4942.01,4154.61 995,4154.61
GND on Top "Top-GND" (hatched 90Degree grid 0.1 track 0.1, remove dead copper, pour order 2): 995,995 4942.01,995 4942.01,4154.61 995,4154.61

## Keep-outs
Keep-Out Layer:
  the board outline again, w10

## Silkscreen, mask and mechanical layers (free items; w line width, h text height)
Top Overlay:
  lines w10: 1000,1787.4 1787.4,1787.4 ; 1000,2574.8 1787.4,2574.8 ; 1000,3362.2 1787.4,3362.2 ; 1787.4,1000 1787.4,1787.4 ; 1787.4,4149.61 1787.4,3362.2 ; 2161.42,1531.5 2161.42,1649.61 ; 2161.42,2751.97 2161.42,2830.71 ; 2259.84,1610.24 2259.84,1649.61 ; 2574.8,1000 2574.8,1787.4 ; 2948.82,1531.5 2948.82,1649.61 ; 2948.82,2751.97 2948.82,2830.71 ; 3047.24,1610.24 3047.24,1649.61 ; 3362.2,1000 3362.2,1787.4 ; 3736.22,1531.5 3736.22,1649.61 ; 3736.22,2751.97 3736.22,2830.71 ; 3834.65,1610.24 3834.65,1649.61 ; 4149.61,1000 4149.61,1787.4 ; 4149.61,4149.61 4149.61,3362.2 ; 4937.01,1787.4 4149.61,1787.4 ; 4937.01,2574.8 4149.61,2574.8 ; 4937.01,3362.2 4149.61,3362.2 ; 1787.4,1787.4 1787.4,2181.1 ; 1787.4,1787.4 2574.8,1787.4 ; 1787.4,2181.1 1787.4,2574.8 ; 1787.4,2181.1 2574.8,2181.1 ; 1787.4,2574.8 1787.4,2968.5 ; 1787.4,2968.5 1787.4,3362.2 ; 1787.4,2968.5 2574.8,2968.5 ; 2574.8,1787.4 3362.2,1787.4 ; 2574.8,2181.1 3362.2,2181.1 ; 2574.8,2181.1 2574.8,2968.5 ; 2574.8,2968.5 3362.2,2968.5 ; 3362.2,1787.4 4149.61,1787.4 ; 3362.2,2181.1 4149.61,2181.1 ; 3362.2,2181.1 3362.2,2968.5 ; 3362.2,2968.5 4149.61,2968.5 ; 4149.61,1787.4 4149.61,2181.1 ; 4149.61,2181.1 4149.61,2574.8 ; 4149.61,2574.8 4149.61,2968.5 ; 4149.61,2968.5 4149.61,3362.2
  text "A8" at 1879.19,4082.51 h42.5
  text "D16" at 3975,4075 h42.5
  text "GND" at 1078.74,4011.81 h42.5 r270
  text "3.3V" at 1177.17,4011.81 h42.5 r270
  text "GND" at 1275.59,4011.81 h42.5 r270
  text "3.3V" at 1374.02,4011.81 h42.5 r270
  text "A9" at 1879.19,3982.51 h42.5
  text "D17" at 3975,3975 h42.5
  text "D1" at 3517.49,3968.35 h42.5 r90
  text "5V" at 2717.49,3954.19 h42.5 r90
  text "5V" at 2817.49,3954.19 h42.5 r90
  text "D5" at 3117.49,3954.19 h42.5 r90
  text "D4" at 3217.49,3954.19 h42.5 r90
  text "D3" at 3317.49,3954.19 h42.5 r90
  text "D2" at 3417.49,3954.19 h42.5 r90
  text "D0" at 3617.49,3954.19 h42.5 r90
  text "GND" at 1536.31,3949.64 h42.5
  text "12V" at 2917.49,3918.78 h42.5 r90
  text "12V" at 3017.49,3918.78 h42.5 r90
  text "D14" at 3717.49,3918.78 h42.5 r90
  text "D15" at 3817.49,3918.78 h42.5 r90
  text "GND" at 2317.49,3911.7 h42.5 r90
  text "GND" at 2417.49,3911.7 h42.5 r90
  text "A10" at 1843.78,3882.51 h42.5
  text "12V" at 4642.49,3881.28 h42.5 r90
  text "12V" at 4842.49,3881.28 h42.5 r90
  text "3.3V" at 2517.49,3876.3 h42.5 r90
  text "3.3V" at 2617.49,3876.3 h42.5 r90
  text "D18" at 3975,3875 h42.5
  text "GND" at 4542.49,3874.2 h42.5 r90
  text "GND" at 4742.49,3874.2 h42.5 r90
  text "5V" at 1578.8,3851.21 h42.5
  text "D5" at 4287.4,3814.96 h42.5
  text "A11" at 1857.95,3782.51 h42.5
  text "D19" at 3975,3775 h42.5
  text "A8" at 1578.8,3752.79 h42.5
  text "A5" at 1196.85,3716.54 h85
  text "D4" at 4287.4,3716.54 h42.5
  text "D5" at 4598.54,3710.31 h85
  text "A12" at 1843.78,3682.51 h42.5
  text "D20" at 3975,3675 h42.5
  text "12V" at 1078.74,3657.48 h42.5 r270
  text "GND" at 1177.17,3657.48 h42.5 r270
  text "12V" at 1275.59,3657.48 h42.5 r270
  text "GND" at 1374.02,3657.48 h42.5 r270
  text "A9" at 1578.8,3654.36 h42.5
  text "5V" at 4287.4,3618.11 h42.5
  text "Part 2" at 2496.06,3598.43 h170
  text "A13" at 1843.78,3582.51 h42.5
  text "D21" at 3975,3575 h42.5
  text "GND" at 4287.4,3519.69 h42.5
  text "3.3V" at 4550,3500 h42.5 r90
  text "GND" at 4650,3500 h42.5 r90
  text "3.3V" at 4750,3500 h42.5 r90
  text "GND" at 4850,3500 h42.5 r90
  text "A14" at 1843.78,3482.51 h42.5
  text "A15" at 1843.78,3382.51 h42.5
  text "GND" at 1078.74,3224.41 h42.5 r270
  text "3.3V" at 1177.17,3224.41 h42.5 r270
  text "GND" at 1275.59,3224.41 h42.5 r270
  text "3.3V" at 1374.02,3224.41 h42.5 r270
  text "GND" at 1536.31,3162.23 h42.5
  text "12V" at 4642.49,3093.78 h42.5 r90
  text "12V" at 4842.49,3093.78 h42.5 r90
  text "GND" at 4542.49,3086.7 h42.5 r90
  text "GND" at 4742.49,3086.7 h42.5 r90
  text "5V" at 1578.8,3063.81 h42.5
  text "D3" at 4287.4,3027.56 h42.5
  text "A10" at 1543.39,2965.38 h42.5
  text "A6" at 1196.85,2929.13 h85
  text "D2" at 4287.4,2929.13 h42.5
  text "D6" at 4598.54,2922.9 h85
  text "12V" at 1078.74,2870.08 h42.5 r270
  text "GND" at 1177.17,2870.08 h42.5 r270
  text "12V" at 1275.59,2870.08 h42.5 r270
  text "GND" at 1374.02,2870.08 h42.5 r270
  text "A11" at 1557.56,2866.96 h42.5
  text "5V" at 4287.4,2830.71 h42.5
  text "D19/RX1" at 2240.16,2771.65 h42.5
  text "D17/RX2" at 3027.56,2771.65 h42.5
  text "D15/RX3" at 3814.96,2771.65 h42.5
  text "5V" at 2085.8,2759.9 h42.5 r90
  text "5V" at 2873.2,2759.9 h42.5 r90
  text "5V" at 3660.6,2759.9 h42.5 r90
  text "GND" at 4287.4,2732.28 h42.5
  text "GND" at 1987.37,2717.41 h42.5 r90
  text "GND" at 2774.77,2717.41 h42.5 r90
  text "GND" at 3562.18,2717.41 h42.5 r90
  text "3.3V" at 4550,2712.5 h42.5 r90
  text "GND" at 4650,2712.5 h42.5 r90
  text "3.3V" at 4750,2712.5 h42.5 r90
  text "GND" at 4850,2712.5 h42.5 r90
  text "D18/TX1" at 2141.73,2692.91 h42.5
  text "D16/TX2" at 2929.13,2692.91 h42.5
  text "D14/TX3" at 3716.54,2692.91 h42.5
  text "GND" at 2304.02,2571.68 h42.5
  text "GND" at 3091.42,2571.68 h42.5
  text "GND" at 3878.83,2571.68 h42.5
  text "3.3V" at 1925.2,2555.12 h42.5
  text "3.3V" at 2712.6,2555.12 h42.5
  text "3.3V" at 3500,2555.12 h42.5
  text "12V" at 2311.1,2473.26 h42.5
  text "12V" at 3098.5,2473.26 h42.5
  text "12V" at 3885.91,2473.26 h42.5
  text "GND" at 1925.2,2456.69 h42.5
  text "GND" at 2712.6,2456.69 h42.5
  text "GND" at 3500,2456.69 h42.5
  text "GND" at 1078.74,2437.01 h42.5 r270
  text "3.3V" at 1177.17,2437.01 h42.5 r270
  text "GND" at 1275.59,2437.01 h42.5 r270
  text "3.3V" at 1374.02,2437.01 h42.5 r270
  text "GND" at 1536.31,2374.83 h42.5
  text "GND" at 2304.02,2374.83 h42.5
  text "GND" at 3091.42,2374.83 h42.5
  text "GND" at 3878.83,2374.83 h42.5
  text "3.3V" at 1925.2,2358.27 h42.5
  text "3.3V" at 2712.6,2358.27 h42.5
  text "3.3V" at 3500,2358.27 h42.5
  text "12V" at 4642.49,2306.28 h42.5 r90
  text "12V" at 4842.49,2306.28 h42.5 r90
  text "GND" at 4542.49,2299.2 h42.5 r90
  text "GND" at 4742.49,2299.2 h42.5 r90
  text "5V" at 1578.8,2276.41 h42.5
  text "12V" at 2311.1,2276.41 h42.5
  text "12V" at 3098.5,2276.41 h42.5
  text "12V" at 3885.91,2276.41 h42.5
  text "GND" at 1925.2,2259.84 h42.5
  text "GND" at 2712.6,2259.84 h42.5
  text "GND" at 3500,2259.84 h42.5
  text "S4" at 4287.4,2240.16 h42.5
  text "UART1" at 2220.47,2220.47 h85 r90
  text "UART2" at 3007.87,2220.47 h85 r90
  text "UART3" at 3795.28,2220.47 h85 r90
  text "A12" at 1543.39,2177.98 h42.5
  text "A7" at 1196.85,2141.73 h85
  text "S3" at 4287.4,2141.73 h42.5
  text "S1" at 4626.86,2135.5 h85
  text "S4" at 3925,2112.5 h42.5
  text "12V" at 1078.74,2082.68 h42.5 r270
  text "GND" at 1177.17,2082.68 h42.5 r270
  text "12V" at 1275.59,2082.68 h42.5 r270
  text "GND" at 1374.02,2082.68 h42.5 r270
  text "A13" at 1543.39,2079.56 h42.5
  text "5V" at 4287.4,2043.31 h42.5
  text "S3" at 3925,2012.5 h42.5
  text "GND" at 4287.4,1944.88 h42.5
  text "3.3V" at 4550,1925 h42.5 r90
  text "GND" at 4650,1925 h42.5 r90
  text "3.3V" at 4750,1925 h42.5 r90
  text "GND" at 4850,1925 h42.5 r90
  text "S2" at 3925,1912.5 h42.5
  text "JUMP" at 3831.52,1826.77 h42.5 r90
  text "TO MEGA" at 3874.02,1826.77 h42.5 r90
  text "S1" at 3925,1812.5 h42.5
  text "GND" at 1078.74,1649.61 h42.5 r270
  text "3.3V" at 1177.17,1649.61 h42.5 r270
  text "GND" at 1275.59,1649.61 h42.5 r270
  text "3.3V" at 1374.02,1649.61 h42.5 r270
  text "GND" at 1536.31,1587.43 h42.5
  text "5V" at 2085.8,1578.8 h42.5 r90
  text "5V" at 2873.2,1578.8 h42.5 r90
  text "5V" at 3660.6,1578.8 h42.5 r90
  text "D21/SCL" at 2240.16,1551.18 h42.5
  text "D21/SCL" at 3027.56,1551.18 h42.5
  text "D21/SCL" at 3814.96,1551.18 h42.5
  text "GND" at 1987.37,1536.31 h42.5 r90
  text "GND" at 2774.77,1536.31 h42.5 r90
  text "GND" at 3562.18,1536.31 h42.5 r90
  text "12V" at 4642.49,1518.78 h42.5 r90
  text "12V" at 4842.49,1518.78 h42.5 r90
  text "GND" at 4542.49,1511.7 h42.5 r90
  text "GND" at 4742.49,1511.7 h42.5 r90
  text "5V" at 1578.8,1489.01 h42.5
  text "D20/SDA" at 2141.73,1472.44 h42.5
  text "D20/SDA" at 2929.13,1472.44 h42.5
  text "D20/SDA" at 3716.54,1472.44 h42.5
  text "S2" at 4287.4,1452.76 h42.5
  text "A14" at 1543.39,1390.58 h42.5
  text "GND" at 2304.02,1390.58 h42.5
  text "GND" at 3091.42,1390.58 h42.5
  text "GND" at 3878.83,1390.58 h42.5
  text "3.3V" at 1925.2,1374.02 h42.5
  text "3.3V" at 2712.6,1374.02 h42.5
  text "3.3V" at 3500,1374.02 h42.5
  text "A8" at 1196.85,1354.33 h85
  text "S1" at 4287.4,1354.33 h42.5
  text "S2" at 4598.54,1348.1 h85
  text "12V" at 1078.74,1295.28 h42.5 r270
  text "GND" at 1177.17,1295.28 h42.5 r270
  text "12V" at 1275.59,1295.28 h42.5 r270
  text "GND" at 1374.02,1295.28 h42.5 r270
  text "A15" at 1543.39,1292.16 h42.5
  text "12V" at 2311.1,1292.16 h42.5
  text "12V" at 3098.5,1292.16 h42.5
  text "12V" at 3885.91,1292.16 h42.5
  text "GND" at 1925.2,1275.59 h42.5
  text "GND" at 2712.6,1275.59 h42.5
  text "GND" at 3500,1275.59 h42.5
  text "5V" at 4287.4,1255.91 h42.5
  text "GND" at 2304.02,1193.73 h42.5
  text "GND" at 3091.42,1193.73 h42.5
  text "GND" at 3878.83,1193.73 h42.5
  text "3.3V" at 1925.2,1177.17 h42.5
  text "3.3V" at 2712.6,1177.17 h42.5
  text "3.3V" at 3500,1177.17 h42.5
  text "GND" at 4287.4,1157.48 h42.5
  text "3.3V" at 4550,1137.5 h42.5 r90
  text "GND" at 4650,1137.5 h42.5 r90
  text "3.3V" at 4750,1137.5 h42.5 r90
  text "GND" at 4850,1137.5 h42.5 r90
  text "12V" at 2311.1,1095.31 h42.5
  text "12V" at 3098.5,1095.31 h42.5
  text "12V" at 3885.91,1095.31 h42.5
  text "GND" at 1925.2,1078.74 h42.5
  text "I2C1" at 2220.47,1078.74 h85 r90
  text "GND" at 2712.6,1078.74 h42.5
  text "I2C2" at 3007.87,1078.74 h85 r90
  text "GND" at 3500,1078.74 h42.5
  text "I2C3" at 3795.28,1078.74 h85 r90
Dimension:
  the board outline again, w10